# EAGLE board PCB (EAGLE 9.7.0)
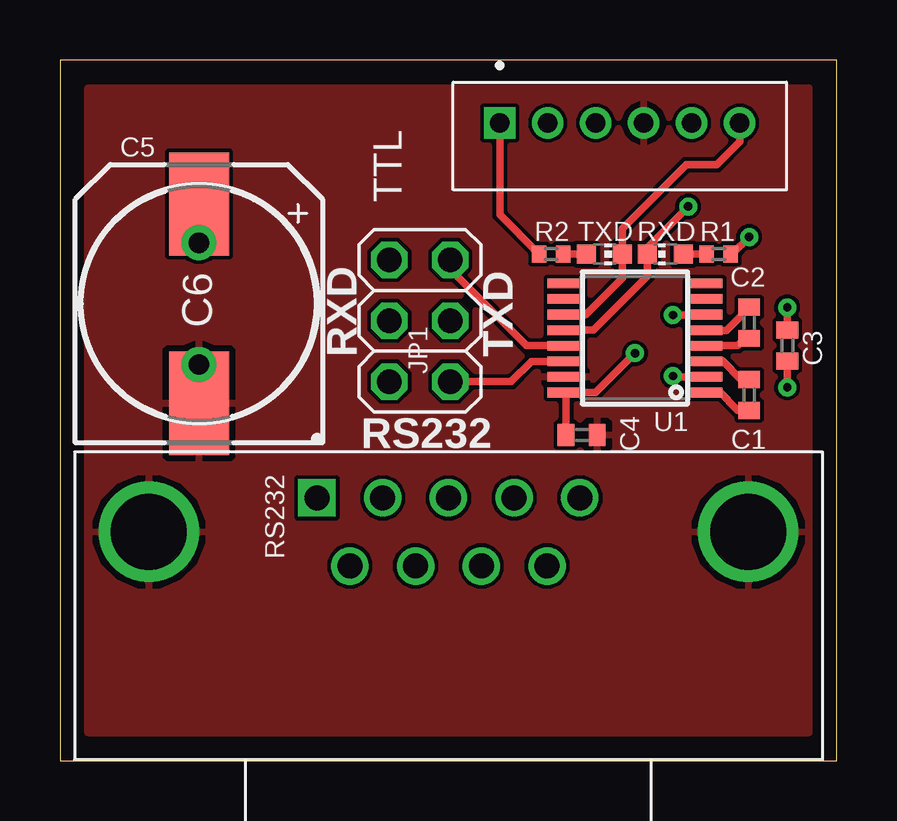
[diagram p0: board, top side]
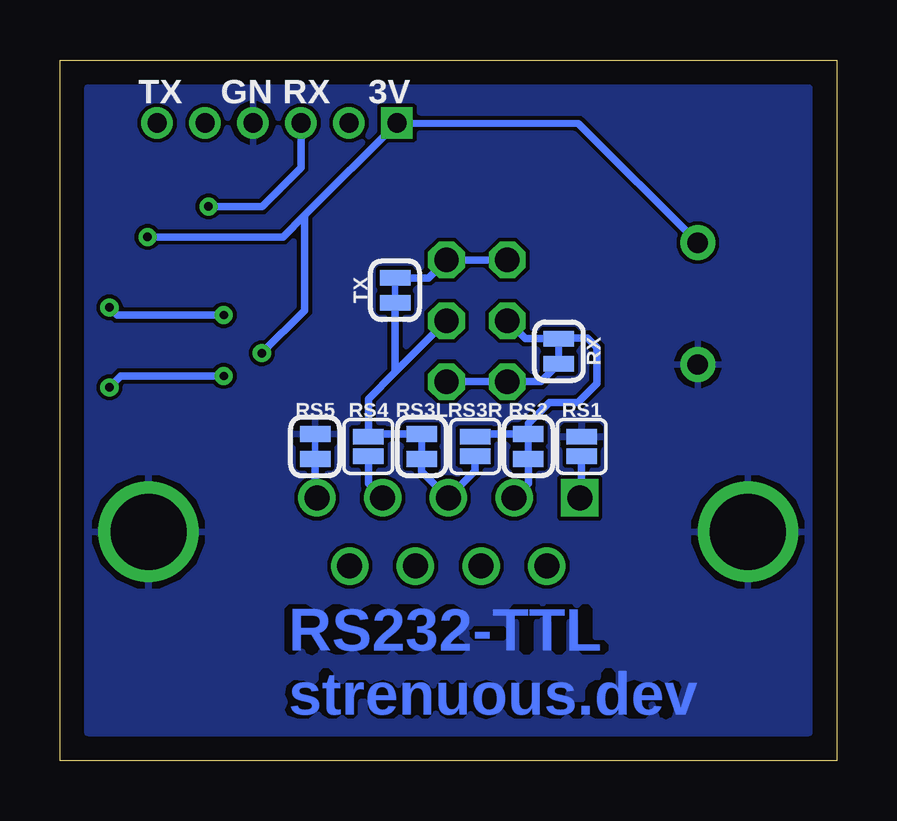
[diagram p1: board, bottom side, seen from below]

Size 32.38 x 29.21 mm. Coordinates in mm from the lower left corner, seen from the top.
Outline: 0,0 32.38,0 32.38,29.21 0,29.2 0,0
Copper layers (1*16): Top / Bottom
Stack-up Default Layer Stack: Top User Defined 0.035mm / Dielectric-1 User Defined 1.5mm / Bottom User Defined 0.035mm
Design rules: minimum copper width 6mil, minimum drill size 0.35mm, copper clearance wire_polygon to wire_polygon 6mil, copper clearance wire_polygon to pad_smd 6mil, copper clearance wire_polygon to via 6mil, copper clearance pad_smd to pad_smd 6mil, copper clearance pad_smd to via 6mil, copper clearance via to via 6mil, copper clearance smd to pad (same net) 6mil, copper clearance smd to via (same net) 6mil, copper clearance smd to smd (same net) 6mil, dimension clearance 40mil, via restrict clearance 0mil, restrict clearance 0mil, drill distance 6mil, keepout clearance 0mil

## Footprints (pad centres in the part's own frame; a part is rotated, then mirrored left to right if it is on the bottom)
C0402 = smd 0.7 x 0.9: 1 -0.65,0; 2 0.65,0
140CLH-1010 = smd 4.3 x 2.5: + 4.15,0; - -4.15,0
CAPPRD508W65D1000H1100B = drill 0.85 pad 1.45: 1 -2.54,0; 2 2.54,0
2X03 = drill 1.016 octagon: 1 -2.54,-1.27; 2 -2.54,1.27; 3 0,-1.27; 4 0,1.27; 5 2.54,-1.27; 6 2.54,1.27
R0402 = smd 0.6 x 0.7: 1 -0.5,0; 2 0.5,0
SMT-JUMPER_2_NO_SILK = smd 0.635 x 1.27: 1 -0.406,0; 2 0.406,0
SMT-JUMPER_2_NC_TRACE_SILK = smd 0.66 x 1.27: 1 -0.521,0; 2 0.521,0
5747840-4 = drill 1.04 square: 1 0,0 | drill 1.04: 2 2.74,0; 3 5.48,0; 4 8.22,0; 5 10.96,0; 6 1.37,-2.84; 7 4.11,-2.84; 8 6.85,-2.84; 9 9.59,-2.84 | drill 3.17: MH1 -7.01,-1.42; MH2 17.98,-1.42
CHIP-LED0603 = smd 0.8 x 0.8: A 0,-0.75; C 0,0.75
JST_B6B-PH-K-S(LF)(SN) = drill 0.8 square: 1 5,-0.55 | drill 0.8: 2 3,-0.55; 3 1,-0.55; 4 -1,-0.55; 5 -3,-0.55; 6 -5,-0.55
TSSOP16 = smd 0.4 x 1.5: 1 -2.275,-2.9; 2 -1.625,-2.9; 3 -0.975,-2.9; 4 -0.325,-2.9; 5 0.325,-2.9; 6 0.975,-2.9; 7 1.625,-2.9; 8 2.275,-2.9; 9 2.275,2.9; 10 1.625,2.9; 11 0.975,2.9; 12 0.325,2.9; 13 -0.325,2.9; 14 -0.975,2.9; 15 -1.625,2.9; 16 -2.275,2.9

## Placement (x,y rotation side)
C1  100n  [C0402]  28.73,15.24 90 top
C2  100n  [C0402]  28.73,18.26 90 top
C3  100n  [C0402]  30.32,17.3 90 top
C4  100n  [C0402]  21.75,13.57 0 top
C5  1000uF  [140CLH-1010]  5.79,19.05 90 top
C6  [CAPPRD508W65D1000H1100B]  5.79,19.05 270 top
JP1  PINHD-2X3  [2X03]  15,18.34 270 top
R1  1k  [R0402]  27.46,21.11 0 top
R2  1k  [R0402]  20.48,21.11 180 top
RS1  JUMPER-SMT_2_NO_SILK  [SMT-JUMPER_2_NO_SILK]  10.64,13.1 270 bottom
RS2  JUMPER-SMT_2_NO_SILK  [SMT-JUMPER_2_NC_TRACE_SILK]  12.86,13.1 270 bottom
RS3L  JUMPER-SMT_2_NC_TRACE_SILK  [SMT-JUMPER_2_NC_TRACE_SILK]  17.3,13.1 270 bottom
RS3R  JUMPER-SMT_2_NC_TRACE_SILK  [SMT-JUMPER_2_NO_SILK]  15.08,13.1 270 bottom
RS4  JUMPER-SMT_2_NO_SILK  [SMT-JUMPER_2_NO_SILK]  19.53,13.1 270 bottom
RS5  JUMPER-SMT_2_NO_SILK  [SMT-JUMPER_2_NC_TRACE_SILK]  21.75,13.1 270 bottom
RS232  D-DMR009  [5747840-4]  10.72,10.95 0 top
RX  JUMPER-SMT_2_NC_TRACE_SILK  [SMT-JUMPER_2_NC_TRACE_SILK]  11.59,17.07 270 bottom
RXD  RED  [CHIP-LED0603]  25.24,21.11 90 top
TTL  B6B-PH-K-S(LF)(SN)  [JST_B6B-PH-K-S(LF)(SN)]  23.34,26.04 180 top
TX  JUMPER-SMT_2_NC_TRACE_SILK  [SMT-JUMPER_2_NC_TRACE_SILK]  18.41,19.61 90 bottom
TXD  GREEN  [CHIP-LED0603]  22.7,21.11 270 top
U1  SP3232XTSSOP  [TSSOP16]  23.97,17.62 90 top

## Library data of the parts
C1-C5 = rcl; SPICEPREFIX: C
C6 = Capacitor; CATEGORY: Capacitor
JP1 = Connector; CATEGORY: Headers; DESCRIPTION: Header, Straight, 2x3 Position; MANUFACTURER: Generic; MPN: Generic; OPERATING_TEMPERATURE: Generic; PART_STATUS: Active; PITCH: 0.100" (2.54mm); ROHS_COMPLIANCE: Generic; SERIES: Generic; SUB-CATEGORY: Headers, Male Pins; TYPE: Board to Board or Cable, Unshrouded, Through Hole, Straight
R1 R2 = rcl; SPICEPREFIX: R
RS1 RS2 RS3L RS3R RS4 RS5 RX TX = SparkFun-Jumpers
RS232 = Connector_D-Sub; CATEGORY: Connector; DESCRIPTION: PCB D-Sub Connectors, Receptacle, Board-to-Board, 9 Position, 2.74mm [.108in] Centerline, 2 Row, Row-to-Row Spacing 2.84 mm [.112 in]; GENDER: Male; MANUFACTURER: TE Connectivity; MPN: 5747840-4; OPERATING_TEMP: -55°C to +105 °C; PART_STATUS: Active; ROHS_COMPLIANT: RoHS Compliant; SERIES: AMPLIMITE HD-20; SUB-CATEGORY: D-SUB; TYPE: R/A
RXD TXD = led
TTL = B6B-PH-K-S_LF__SN_; AVAILABILITY: In Stock; CHECK_PRICES: https://www.snapeda.com/parts/B6B-PH-K-S(LF)(SN)/JST/view-part/?ref=eda; DESCRIPTION: Connector Header Through Hole 6 position 0.079 (2.00mm); MF: JST Sales America Inc.; MP: B6B-PH-K-S(LF)(SN); PACKAGE: None; PRICE: None; SNAPEDA_LINK: https://www.snapeda.com/parts/B6B-PH-K-S(LF)(SN)/JST/view-part/?ref=snap
U1 = SP3232EEY-L

## Nets
3V3: C4.1 C5.+ C6.1 R1.2 R2.2 TTL.1 U1.16
C1+: C1.1 U1.1
C1-: C1.2 U1.3
C2+: C2.1 U1.4
C2-: C2.2 U1.5
GND: C4.2 C5.- C6.2 RS1.1 RS5.1 RS232.MH1 RS232.MH2 TTL.4 U1.15
N$1: R1.1 RXD.A
N$2: R2.1 TXD.A
R1_IN: JP1.1 JP1.2 TX.2 U1.13
R1_OUT: RXD.C TTL.3 U1.12
RS232_1: RS1.2 RS232.1
RS232_2: RS2.2 RS232.2
RS232_3: RS3L.2 RS3R.2 RS232.3
RS232_4: RS4.2 RS232.4
RS232_5: RS5.2 RS232.5
RS232_RXD: JP1.3 RS2.1 RS3R.1 RX.1
RS232_TXD: JP1.4 RS3L.1 RS4.1 TX.1
T1_IN: TTL.6 TXD.C U1.11
T1_OUT: JP1.5 JP1.6 RX.2 U1.14
V+: C3.1 U1.2
V-: C3.2 U1.6

## Tracks (layer width: path | path; a pad name or v marks a point on that pad's centre or on a via)
3V3  (via drill 0.35)
  Top 0.305: C4.1 21.1,15.32 U1.16 22.33,15.35 v23.97,16.99 | C5.+ C6.1 | R1.2 28.02,21.11 v28.73,21.83 | R2.2 18.34,22.76 TTL.1
  Bottom 0.305: C6.1 10.76,26.56 TTL.1 22.18,22.74 | v23.97,16.99 22.18,18.77 22.18,22.74 | v28.73,21.83 25.48,21.83 25.24,21.83 23.09,21.83 22.18,22.74
C1+
  Top 0.305: U1.1 26.92,15.4 27.46,15.4 28.26,14.61 28.72,14.61 C1.1
C1-
  Top 0.305: U1.3 26.89,16.67 27.62,16.67 28.42,15.88 28.72,15.88 C1.2
C2+
  Top 0.305: C2.1 28.65,17.69 28.26,17.3 U1.4
C2-
  Top 0.305: C2.2 28.73,18.89 27.78,17.94 U1.5
GND
  pour Bottom: 0,0 33.1,0 33.1,29.21 0,29.21
  pour Top: 0,0 0,29.21 33.1,29.21 33.1,0
N$1
  Top 0.305: RXD.A R1.1
N$2
  Top 0.305: TXD.A R2.1
R1_IN
  Top 0.305: U1.13 19.45,17.3 16.27,20.48 JP1.2
  Bottom 0.305: JP1.1 JP1.2 17.02,20.13 TX.2
R1_OUT  (via drill 0.35)
  Top 0.305: U1.12 22.23,17.95 24.49,20.2 RXD.C 24.49,21.4 v26.19,23.1
  Bottom 0.305: v26.19,23.1 23.96,23.1 22.34,24.72 TTL.3
RS232_1
  Bottom 0.305: RS232.1 10.64,11.03 RS1.2
RS232_2
  Bottom 0.305: RS232.2 12.86,11.55 RS2.2
RS232_3
  Bottom 0.305: RS3L.2 17.3,12.06 RS232.3 15.08,12.07 RS3R.2
RS232_4
  Bottom 0.305: RS232.4 19.53,11.54 RS4.2
RS232_5
  Bottom 0.305: RS232.5 21.75,11.03 RS5.2
RS232_RXD
  Bottom 0.305: RS3R.1 14.97,13.62 RS2.1 12.86,14.05 11.99,14.92 10.79,14.92 10,15.72 10,17.22 10.4,17.62 11.55,17.62 RX.1 12.98,17.59 JP1.3
RS232_TXD
  Bottom 0.305: 18.41,16.19 19.53,15.08 RS4.1 19.41,13.62 RS3L.1 | 18.41,16.19 JP1.4 | TX.1 18.41,16.19
T1_IN
  Top 0.305: U1.11 21.93,18.6 23.45,20.12 TXD.C 23.45,22.18 26.11,24.84 27.38,24.84 28.34,25.8 TTL.6
T1_OUT
  Top 0.305: U1.14 19.66,16.65 18.81,15.8 JP1.6
  Bottom 0.305: JP1.6 JP1.5 12.34,15.8 RX.2
V+  (via drill 0.35)
  Top 0.305: U1.2 25.6,16 v25.56,16.03 | v30.32,15.56 C3.1
  Bottom 0.305: v25.56,16.03 29.84,16.03 v30.32,15.56
V-  (via drill 0.35)
  Top 0.305: U1.6 26.85,18.57 v25.56,18.57 | v30.32,18.89 C3.2
  Bottom 0.305: v30.32,18.89 30,18.57 v25.56,18.57

## Text on the board
Bottom: RS232-TTL / strenuous.dev
NamesTop: RXD | TXD | RS232
NamesBottom: TX GN RX 3V
SolderMaskBottom: RS232-TTL / strenuous.dev